# Altium PCB OSSI-1 Interface Board.PcbDoc
Units mil, origin at the board's own origin, x right, y up, seen from the top; angles counter-clockwise.
Board outline 3425.85 x 3229 mil, 2 copper layers (Top, Bottom), stack 61.811 mil thick; 24 components, 45 nets, 119 pads, 45 vias.
Unrouted connection lines stored in the file: 1.
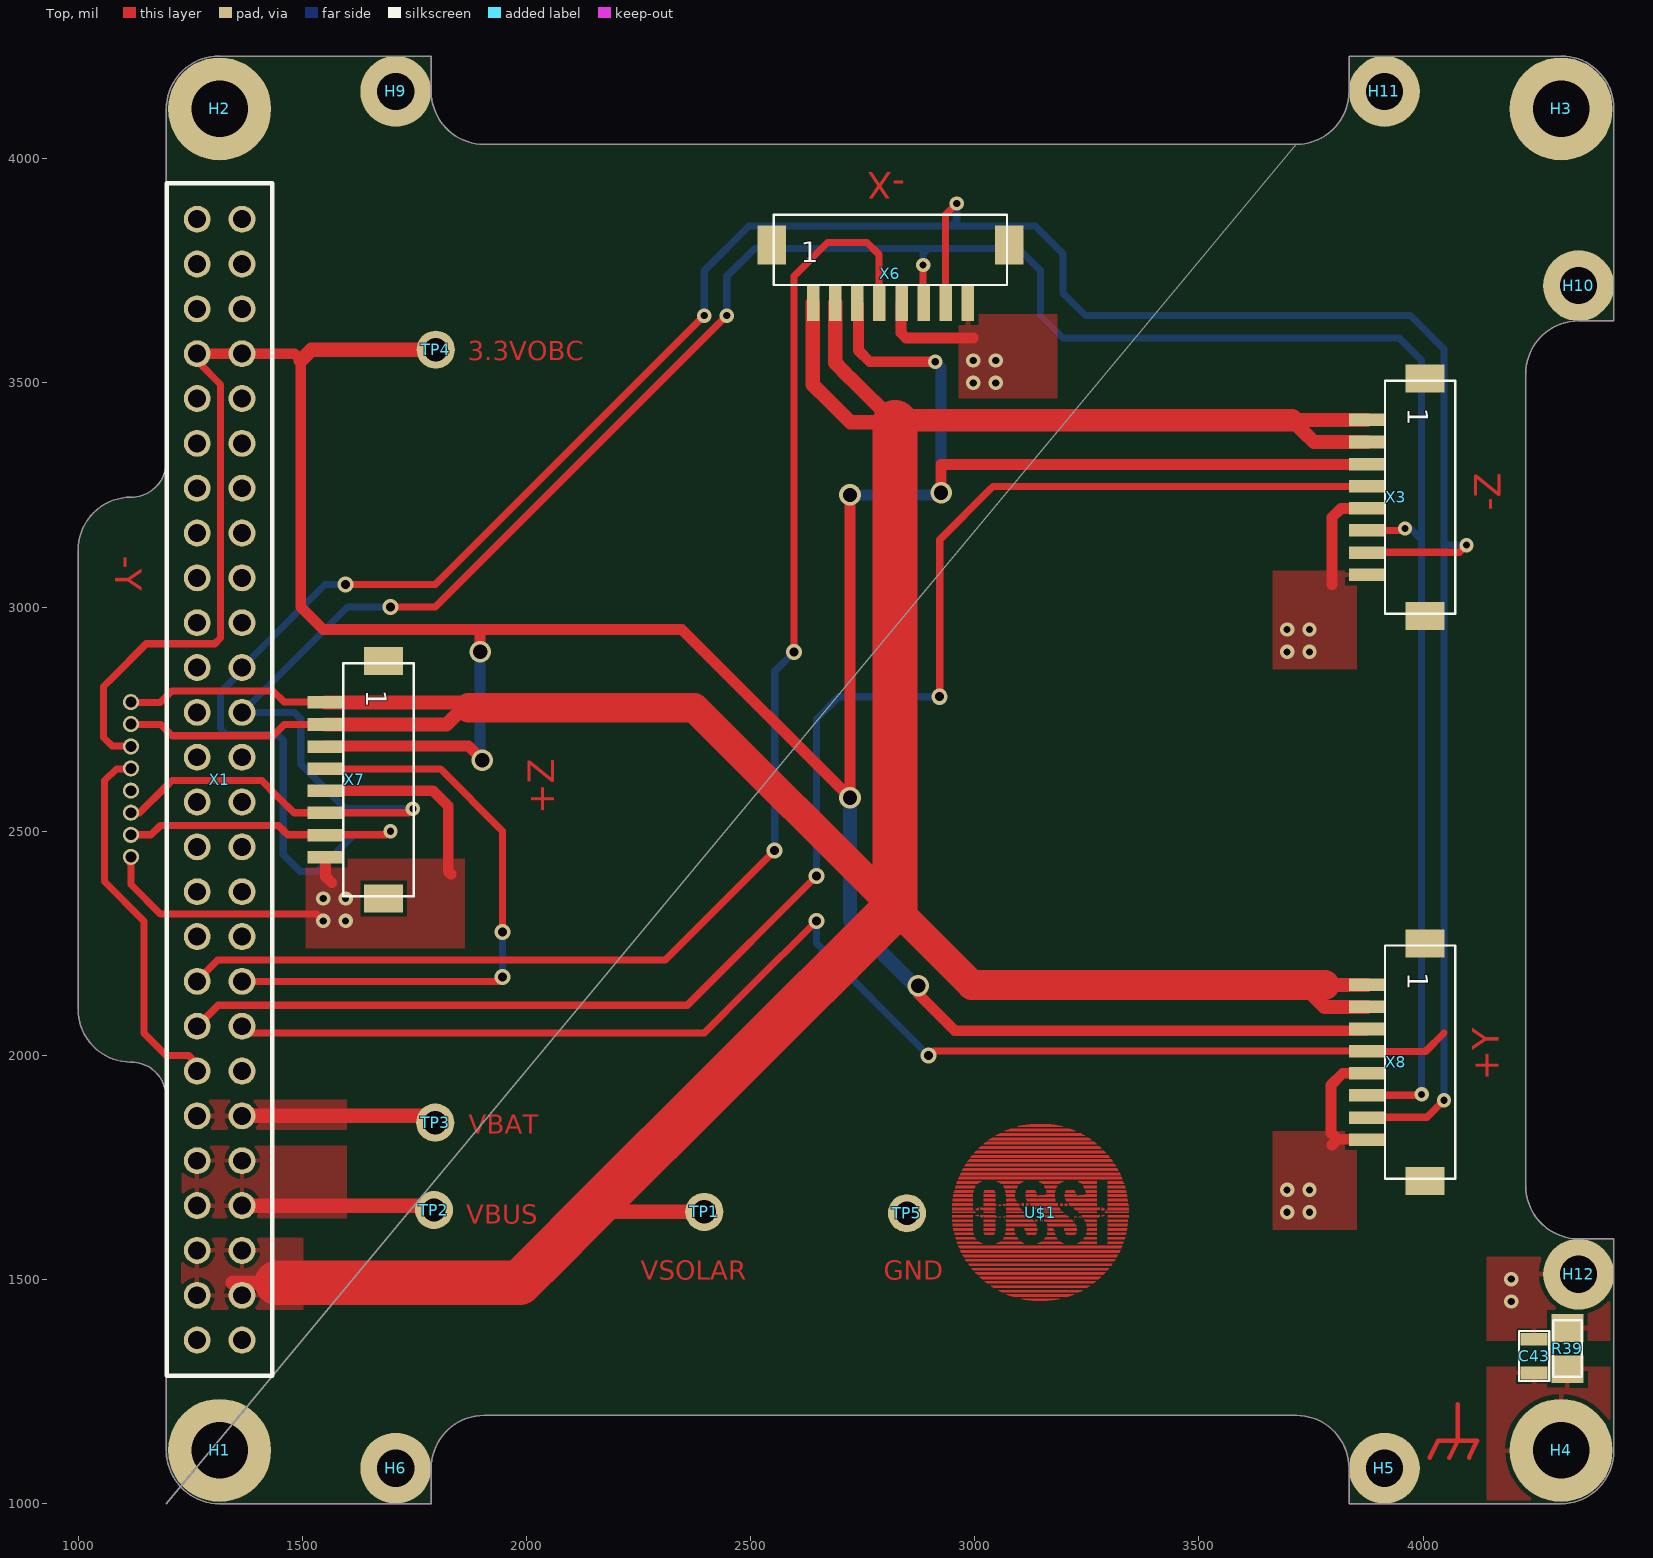
[diagram p0: Top view]
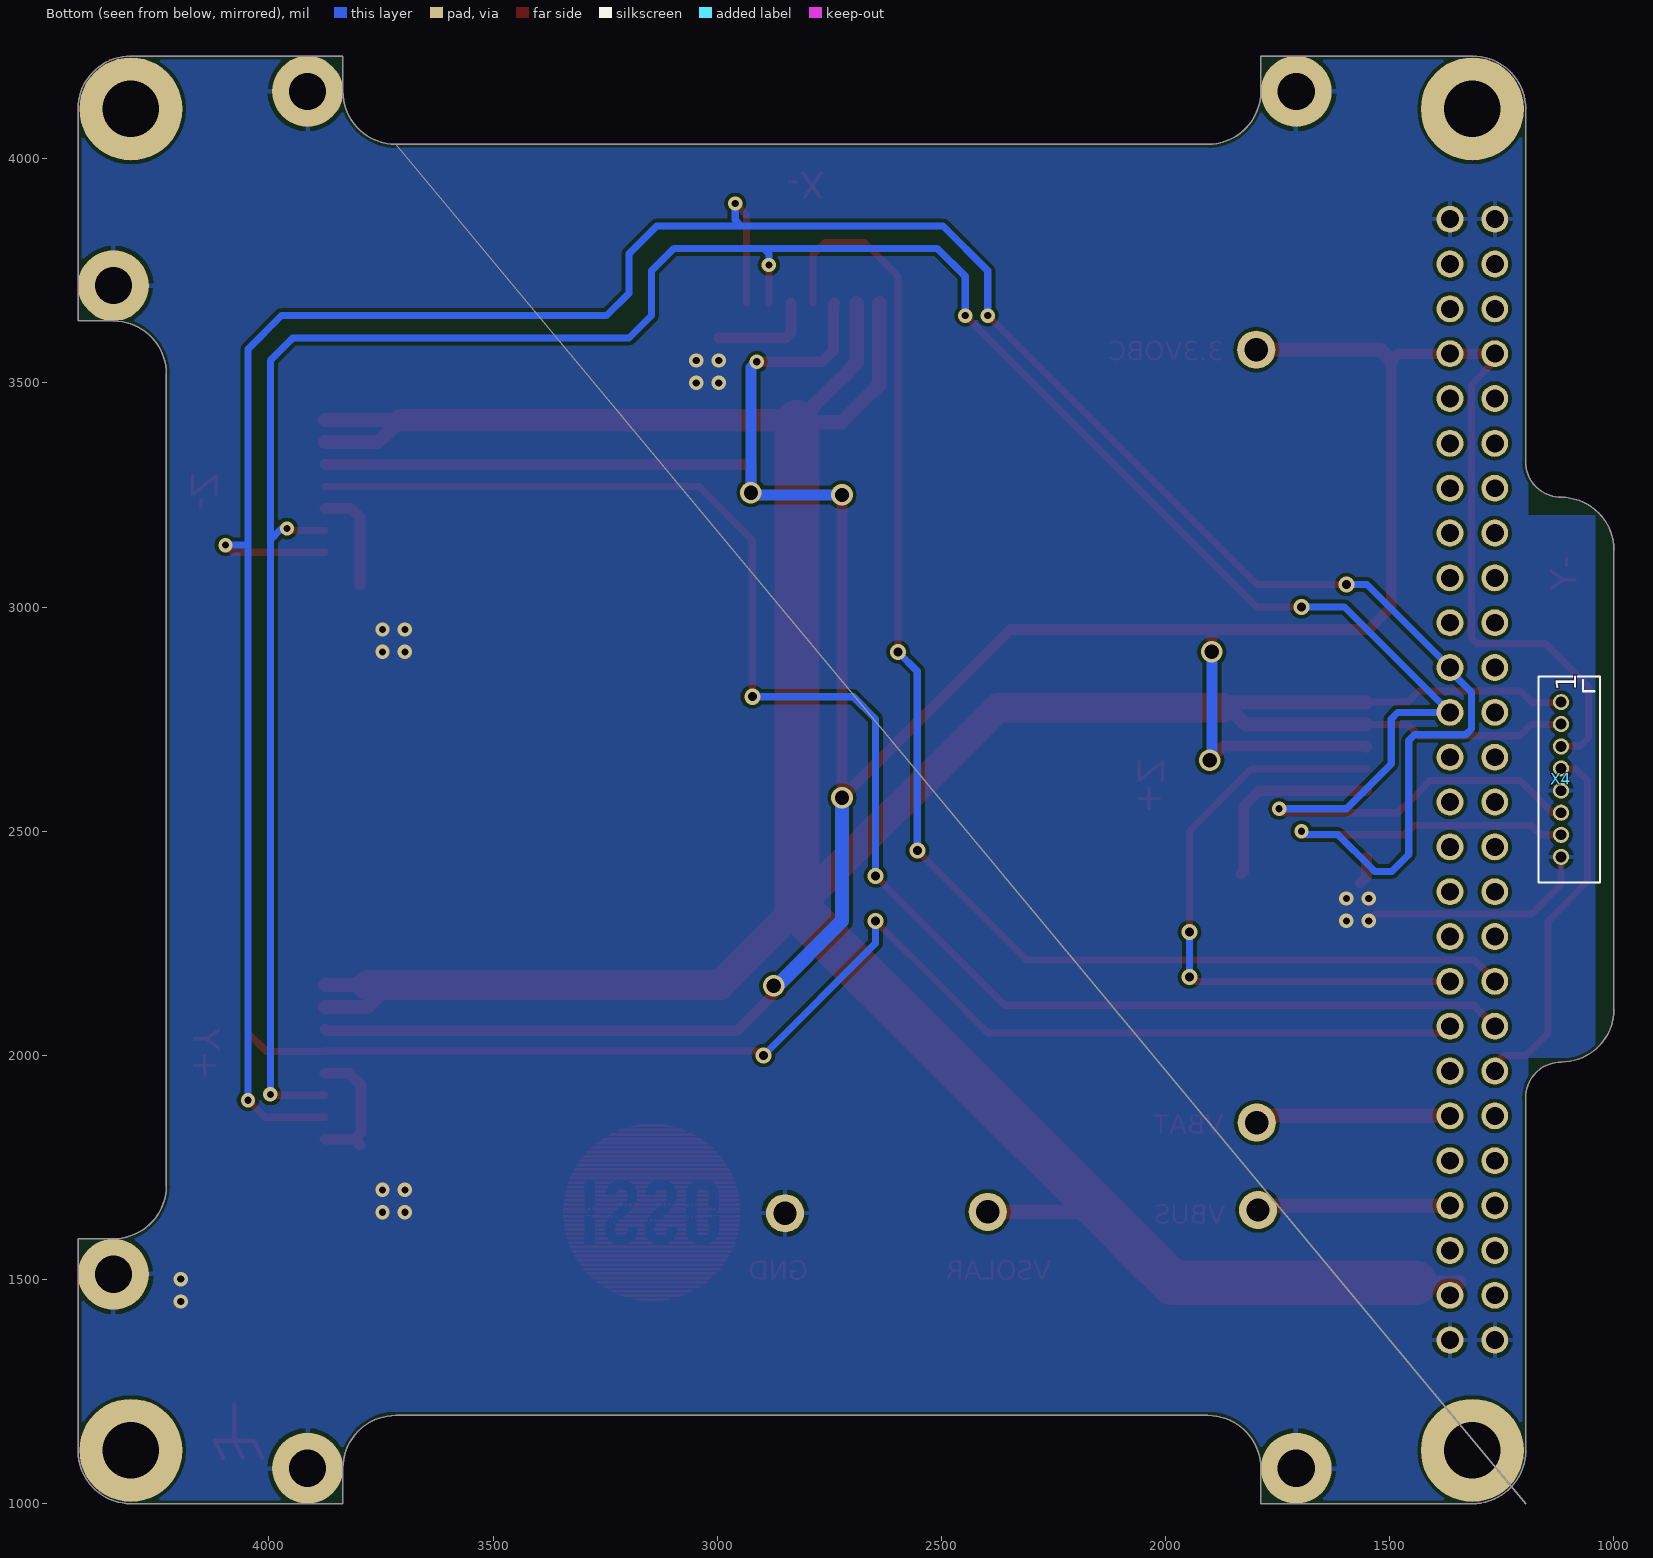
[diagram p1: Bottom view, seen from below]

## Layer stack, top to bottom
Top Solder: solder mask 0.4, Solder Resist, Dk 3.5
Top: signal copper 1.378
Dielectric 1: core 59.0551, FR-4, Dk 4.8
Bottom: signal copper 1.378
Bottom Solder: solder mask 0.4, Solder Resist, Dk 3.5

## Board outline
3716.85,4032 1905.85,4032 cw(c1905.85,4150) 1787.85,4150 1787.85,4229 1315.85,4229 ccw(c1315.35,4110.5) 1196.85,4111 1196.85,3323 cw(c1118.48,3323.37) 1118.11,3245 ccw(c1118.56,3126.44) 1000,3126 1000,2103 ccw(c1118.06,2103.06) 1118.11,1985 cw(c1117.98,1906.13) 1196.85,1906 1196.85,1591 1196.85,1119 ccw(c1315.85,1119) 1315.85,1000 1787.85,1000 1787.85,1079 cw(c1905.85,1079) 1905.85,1197 3716.85,1197 cw(c3716.85,1079) 3834.85,1079 3834.85,1000 4307.85,1000 ccw(c4307.35,1118.5) 4425.85,1119 4425.85,1591 4346.85,1591 cw(c4346.85,1709) 4228.85,1709 4228.85,3520 cw(c4346.85,3520) 4346.85,3638 4425.85,3638 4425.85,4111 ccw(c4307.85,4111) 4307.85,4229 3834.85,4229 3834.85,4150 cw(c3716.85,4150) 1196.85,1000

## Design rules (kind name [scope] priority, off if disabled: settings)
Clearance mdViaVia [IsVia vs IsVia] p1: gap=8
Clearance mdPadVia [IsPad vs IsVia] p2: gap=8
Clearance mdPadPad [IsPad vs IsPad] p3: gap=8
Clearance mdWireVia [(InLayerClass('Signal Layers') AND IsTrack) vs IsVia] p4: gap=8
Clearance mdWirePad [(InLayerClass('Signal Layers') AND IsTrack) vs IsPad] p5: gap=8
Clearance mdWireWire [(InLayerClass('Signal Layers') AND IsTrack) vs (InLayerClass('Signal Layers') AND IsTrack)] p6: gap=8
Clearance [All] p7: gap=8
HoleSize [All] p1: absolutevalues=TRUE maxlimit=100000 minlimit=24 maxpercent=80.000 minpercent=20.000
HoleToHoleClearance [All] p1: gap=8 allowstackedmicrovias=TRUE
PolygonConnect ThermalVias [IsVia] p1: connectstyle=Direct reliefconductorwidth=10 reliefentries=4 polygonreliefangle="90 Angle" airgapwidth=10
PolygonConnect [All] p2: connectstyle=Relief reliefconductorwidth=10 reliefentries=4 polygonreliefangle="90 Angle" airgapwidth=10
RoutingVias [All] p1: holewidth=28 width=50 viastyle="Through Hole" minholewidth=28 minwidth=50 maxholewidth=28 maxwidth=50
SilkToSilkClearance [All] p1 off: silktosilkclearance=10
SilkToSolderMaskClearance [IsPad] p1 off: minsilkscreentomaskgap=10 clearancetoexposedcopper=TRUE
SolderMaskExpansion [All] p1: expansion=4
Width [All] p1: maxlimit=100000 minlimit=10 preferedwidth=10
26 further rules are at their usual default settings.

## Components (designator, comment, footprint, x,y, rotation, side; value= is the part's Value field where it differs from the comment)
C43 "DNP" C0805(2012) 4247.85,1329 r90 top
H1 "" 3.2-PAD-ROUND 1315.85,1119 r0 top
H2 "" 3.2-PAD-ROUND 1315.85,4111 r0 top
H3 "" 3.2-PAD-ROUND 4307.85,4111 r0 top
H4 "" 3.2-PAD-ROUND 4307.85,1119 r0 top
H5 "" 2.1-PAD-ROUND 3913.85,1079 r0 top
H6 "" 2.1-PAD-ROUND 1708.85,1079 r0 top
H9 "" 2.1-PAD-ROUND 1708.85,4150 r0 top
H10 "" 2.1-PAD-ROUND 4346.85,3717 r0 top
H11 "" 2.1-PAD-ROUND 3913.85,4150 r0 top
H12 "" 2.1-PAD-ROUND 4346.85,1512 r0 top
R39 "DNP" WSL1206 4321.85,1346 r270 top
TP1 "TP" TP-13 2396.85,1651 r0 top
TP2 "TP" TP-13 1793.85,1655 r0 top
TP3 "TP" TP-13 1796.85,1850 r0 top
TP4 "TP" TP-13 1797.85,3574 r0 top
TP5 "TP" TP-13 2848.85,1648 r0 top
U$1 "" OSSILOGO1010 3146.85,1650 r0 top
X1 "ESQ-126-38-G-D" ESQ-126-XX-X-D 1315.85,2615 r180 top
X3 "DF13DF13A-8P-1.25H" DF13A-8P 3874.85,3245 r270 top
X4 "DF13DF13-8P-1.25DSA" DF13-8P-1.25DSA 1118.11,2615 r90 bottom
X6 "DF13DF13A-8P-1.25H" DF13A-8P 2811.85,3678 r0 top
X7 "DF13DF13A-8P-1.25H" DF13A-8P 1551.85,2615 r270 top
X8 "DF13DF13A-8P-1.25H" DF13A-8P 3874.85,1985 r270 top

## Footprints (in the part's own frame and the unit in brackets; to place one, negate y for a bottom-side part, rotate by r counter-clockwise, add the part's x,y. Pads: shape width x height; smd on the part's side, far side on the other; paste and mask are expansions set on the pad)
2.1-PAD-ROUND [mil] "2.1-PAD-ROUND"
  round 158 hole 83: B3,2(0,0)
3.2-PAD-ROUND [mil] "3.2-PAD-ROUND"
  round 230 hole 126: B3,2(0,0)
C0805(2012) [mil] "C0805(2012)"
  rect 28x60 smd: 1(-37.4,0) 2(38,0)
  silkscreen extent -55,-33 56,34
DF13-8P-1.25DSA [mil] "DF13-8P-1.25DSA"
  round 36 hole 24: 1(173,0) 2(124,0) 3(74,0) 4(25,0) 5(-24.61,0) 6(-73.82,0) 7(-123.03,0) 8(-172.24,0)
  silkscreen extent -229,-87 230,50
DF13A-8P [mil] "DF13A-8P"
  rect 28x79 smd: 1(-172.24,0) 2(-123.03,0) 3(-73.82,0) 4(-24.61,0) 5(25,0) 6(74,0) 7(124,0) 8(173,0)
  rect 63x87 smd: P$1(-264.76,130) P$2(265,130)
  silkscreen extent -260,40 260,197
ESQ-126-XX-X-D [mil] "ESQ-126-XX-X-D"
  round 60 hole 40: 1(-50,1250) 2(50,1250) 3(-50,1150) 4(50,1150) 5(-50,1050) 6(50,1050) 7(-50,950) 8(50,950) 9(-50,850) 10(50,850) 11(-50,750) 12(50,750) 13(-50,650) 14(50,650) 15(-50,550) 16(50,550) 17(-50,450) 18(50,450) 19(-50,350) 20(50,350) 21(-50,250) 22(50,250) 23(-50,150) 24(50,150) 25(-50,50) 26(50,50) 27(-50,-50) 28(50,-50) 29(-50,-150) 30(50,-150) 31(-50,-250) 32(50,-250) 33(-50,-350) 34(50,-350) 35(-50,-450) 36(50,-450) 37(-50,-550) 38(50,-550) 39(-50,-650) 40(50,-650) 41(-50,-750) 42(50,-750) 43(-50,-850) 44(50,-850) 45(-50,-950) 46(50,-950) 47(-50,-1050) 48(50,-1050) 49(-50,-1150) 50(50,-1150) 51(-50,-1250) 52(50,-1250)
  silkscreen extent -117,-1330 118,1330
OSSILOGO1010 [mil] "OSSILOGO1010"
  Top drawing of 1008 lines, arcs and shapes, not listed
TP-13 [mil] "TP-13"
  round 85 hole 52: TP(0,0)
WSL1206 [mil] "WSL1206"
  rect 62x71 smd: P$1(-45.87,0) P$2(46,0)
  silkscreen extent -63,-31 63,32

## Part data
C43: library part C0805(2012)
H1 H2 H3 H4: library part 3.2-PAD-ROUND
H5 H6 H9 H10 H11 H12: library part 2.1-PAD-ROUND
R39: library part WSL1206
TP1 TP2 TP3 TP4 TP5: library part TP-13
U$1: library part OSSILOGO1010
X1: library part ESQ-126-XX-X-D
X3 X6 X7 X8: library part DF13A-8P
X4: library part DF13-8P-1.25DSA

## Via types
v1: diameter 32/32 (per signal layer), hole 16, Top to Bottom, 29 vias
v2: diameter 36/36 (per signal layer), hole 20, Top to Bottom, 10 vias
v3: diameter 48/48 (per signal layer), hole 32, Top to Bottom, 6 vias

## Nets (pads, with @x,y where several pads share a name; then routed paths per layer and width w, separated by ;. In a path a pad name is that pad's centre, name@x,y a point inside that pad or via, vN(x,y) a via of type N, cw(c..) or ccw(c..) an arc to the next point about the centre after c; other vN are vias at no path point)
3.3VOBC: TP4.TP X1.45 X1.46 X3.3 X4.3 X6.3 X7.3 X8.3 | length 8329.6
  Top w16: X4.3@1118.11,2688 1117,2690 1076.2,2690 1057.15,2709 1057.15,2823 1076.2,2842 1152.4,2918 1304.85,2918 1317.85,2931 1317.85,3496 1265.85,3549 X1.46
  Top w24: X1.46 X1.45 1482.85,3565 1496.85,3550 1496.85,3000 1546.85,2950 1896.85,2950 ; X7.3@1551.85,2688 1552.85,2690 1870.85,2690 v3(1901.85,2658) ; v3(1896.85,2900) 1896.85,2950 ; v3(2721.85,3250) 2721.85,2700 v3(2721.85,2575) 2346.85,2950 1896.85,2950 ; X6.3@2737.85,3678 2740.85,3675 2740.85,3572 2765.85,3547 v1(2911.85,3547) ; v3(2873.85,2155) 2873.85,2137 2955.85,2055 3870.85,2055 X8.3@3874.85,2059 ; v3(2924.85,3255) 2924.85,3318 3686.85,3318 X3.3@3874.85,3318
  Top w32: 1496.85,3550 1520.85,3574 TP4.TP
  Bottom w24: v3(1896.85,2900) 1896.85,2663 v3(1901.85,2658) ; v3(2721.85,3250) 2919.85,3250 v3(2924.85,3255) 2924.85,3534 v1(2911.85,3547)
  Bottom w32: v3(2721.85,2575) 2721.85,2300 2871.85,2150 2873.85,2152 v3(2873.85,2155)
ANT_DEPLOY1: X1.19
ANT_DEPLOY2: X1.20
BAT_-CHRG: X1.42
BAT_-FAULT: X1.44
BAT_-ON: X1.38
BAT_TEMP: X1.47
BEACON_-FAULT: X1.30
BEACON_OFF: X1.24
BEACON_SCL: X1.37
BEACON_SDA: X1.39
BUS_CS: X1.27
COMMS_-FAULT: X1.32
COMMS_OFF: X1.25
COMMS_SCL: X1.41
COMMS_SDA: X1.43
GND: C43.2 H5.B3,2 H6.B3,2 H9.B3,2 H10.B3,2 H11.B3,2 H12.B3,2 R39.P$1 TP5.TP X1.1 X1.2 X1.51 X1.52 X3.5 X3.8 X4.5 X4.8 X6.5 X6.8 X7.5 X7.8 X8.5 X8.8 | length 1799.2
  Top w16: X4.8@1118.11,2442 1118.11,2381 1184.15,2315 1532.85,2315 v1(1546.85,2300)
  Top w24: X7.8 1551.85,2399 1565.85,2385 ; X7.5 1791.85,2590 1825.85,2556 1825.85,2410 1831.85,2404 ; X6.5@2835.85,3678 2835.85,3612 2846.85,3600 2996.85,3600 ; 3796.85,1800 3809.85,1813 ; 3796.85,3050 3796.85,3200 3816.85,3220 X3.5 ; X8.8@3874.85,1813 3809.85,1813 ; X8.5 3820.85,1960 3794.85,1934 3794.85,1827 3809.85,1813
  other v1: 4196.85,1451 4196.85,1501 3696.85,1650 3746.85,1650 3696.85,1700 3746.85,1700 1596.85,2300 1546.85,2350 1596.85,2350 3696.85,2900 3746.85,2900 3696.85,2950 3746.85,2950 2996.85,3500 3046.85,3500 2996.85,3550 3046.85,3550
LED_-FAULT: X1.28
LED_OFF: X1.23
LED_SCL: X1.33
LED_SDA: X1.35
N$2: 
N$58:  | length 75
  Top w10: 4077.85,1147 4077.85,1222
N$59:  | length 214
  Top w10: 4014.85,1103 4033.85,1141 4077.85,1141 ; 4058.85,1103 4077.85,1141 ; 4102.85,1103 4120.85,1141 4077.85,1141
OBC_-FAULT: X1.34
OBC_OFF: X1.26
PANELTEMP_SCL: X1.29 X3.6 X4.6 X6.6 X7.6 X8.6 | length 6518.5
  Top w16: X4.6@1118.11,2541 1137.2,2541 1196.85,2600 1209.85,2613 1409.85,2613 1446.85,2575 1481.85,2541 X7.6 1737.85,2541 v1(1746.85,2550) ; v2(1696.85,3000) 1796.85,3000 1846.85,3050 v1(2446.85,3650) ; X6.6@2884.85,3678 v1(2884.85,3763) ; X8.6 3994.85,1911 v1(3996.85,1913) ; X3.6 3954.85,3171 v1(3959.85,3175)
  Bottom w16: X1.29@1361.85,2765 X1.29 ; v2(1696.85,3000) 1600.85,3000 X1.29 ; v1(1746.85,2550) 1696.85,2550 1596.85,2550 1496.85,2650 1496.85,2750 1482.85,2765 X1.29 ; v1(2446.85,3650) 2446.85,3738 2509.85,3800 2896.85,3800 ; v1(2884.85,3763) 2884.85,3788 2896.85,3800 ; v1(3959.85,3175) 3971.85,3175 3996.85,3150 ; v1(3996.85,1913) 3996.85,3150 ; 2896.85,3800 3096.85,3800 3146.85,3750 3146.85,3650 3196.85,3600 3946.85,3600 3996.85,3550 3996.85,3150
PANELTEMP_SDA: X1.31 X3.7 X4.7 X6.7 X7.7 X8.7 | length 7194.1
  Top w16: X4.7 1162.99,2492 1184.35,2513 1446.85,2513 1459.85,2500 1468.85,2492 1551.85,2492 1686.85,2492 v1(1696.85,2500) ; v2(1596.85,3050) 1646.85,3050 1796.85,3050 v1(2396.85,3650) ; X6.7@2934.85,3678 2934.85,3875 v1(2959.85,3900) ; X8.7@3874.85,1862 4008.85,1862 v1(4046.85,1900) ; X3.7@3874.85,3122 4080.85,3122 v1(4096.85,3138)
  Bottom w16: v2(1596.85,3050) 1550.85,3050 X1.31 1365.85,2858 1317.85,2810 1317.85,2728 1330.85,2715 1444.85,2715 1457.85,2702 1457.85,2448 1495.85,2410 1533.85,2410 1539.85,2417 1616.85,2493 1685.85,2493 1690.85,2494 v1(1696.85,2500) ; v1(2396.85,3650) 2396.85,3750 2496.85,3850 2946.85,3850 ; v1(2959.85,3900) 2959.85,3863 2946.85,3850 ; v1(4046.85,1900) 4046.85,3138 ; v1(4096.85,3138) 4046.85,3138 ; 2946.85,3850 3134.85,3850 3196.85,3788 3196.85,3700 3246.85,3650 3971.85,3650 4046.85,3575 4046.85,3138
SC_-ON: X1.40
SC_-PFO: X1.48
SCCHG_EN: X1.21
SCOUT_-PG: X1.50
SCOUT_EN: X1.22
SOLAR_-ON: X1.36
SOLAR_CS1: X1.15 X8.4 | length 2970.7
  Top w16: X1.15 1379.85,2050 2396.85,2050 2496.85,2150 v2(2646.85,2300) ; v2(2896.85,2000) 2906.85,2010 3876.85,2010 3874.85,2010 3874.85,2009 4005.85,2009 4046.85,2050
  Bottom w16: v2(2646.85,2300) 2646.85,2250 v2(2896.85,2000)
SOLAR_CS2: X1.14 X4.4 | length 832.4
  Top w16: X4.4@1118.11,2639 1085.63,2639 1059.35,2613 1059.35,2388 1146.85,2300 1146.85,2050 1196.85,2000 1246.85,2000 1265.85,1982 X1.14
SOLAR_CS3: X1.17 X7.4 | length 1363
  Top w16: X1.17 1936.85,2165 v2(1946.85,2175) ; X7.4@1551.85,2639 1808.85,2639 1946.85,2500 v2(1946.85,2275)
  Bottom w16: v2(1946.85,2175) v2(1946.85,2275)
SOLAR_CS4: X1.16 X3.4 | length 3517.8
  Top w16: X1.16 1312.85,2112 1349.85,2112 2276.85,2112 2358.85,2112 v2(2646.85,2400) ; v2(2921.85,2800) 2921.85,3150 3034.85,3263 3040.85,3269 X3.4@3874.85,3269
  Bottom w16: v2(2646.85,2400) 2646.85,2750 2696.85,2800 v2(2921.85,2800)
SOLAR_CS5: X1.18 X6.4 | length 3049.2
  Top w16: X1.18 1265.85,2167 1311.85,2213 2309.85,2213 v2(2553.85,2457) ; v2(2596.85,2900) 2596.85,3650 2596.85,3738 2671.85,3813 2759.85,3813 2784.85,3788 2786.85,3786 2786.85,3761 X6.4@2786.85,3678
  Bottom w16: v2(2553.85,2457) 2553.85,2857 v2(2596.85,2900)
STRUT_GND: C43.1 H4.B3,2 R39.P$2
SUPERCAP_TEMP: X1.49
VBAT: TP3.TP X1.11 X1.12 | length 437.5
  Top w32: X1.11 1782.85,1865 TP3.TP
VBUS: TP2.TP X1.7 X1.8 X1.9 X1.10 | length 443.8
  Top w32: X1.7 1782.85,1665 1796.85,1650 1796.85,1652 TP2.TP
VSOLAR: TP1.TP X1.3 X1.4 X1.5 X1.6 X3.1 X3.2 X4.1 X4.2 X6.1 X6.2 X7.1 X7.2 X8.1 X8.2 | length 9141.6
  Top w12: 3756.85,2132 3756.85,2157
  Top w16: X4.2@1118.11,2738 1184.65,2738 1209.85,2713 1434.85,2713 1459.85,2738 X7.2 ; X4.1@1118.11,2787 1183.27,2787 1209.85,2813 1434.85,2813 1459.85,2788 1546.85,2788 1550.85,2788 X7.1@1551.85,2787
  Top w32: 1344.85,1493 1443.85,1493 ; X7.2 1821.85,2738 1865.85,2782 ; X7.1@1551.85,2787 1860.85,2787 1865.85,2782 ; 1871.85,2775 1865.85,2782 ; 2119.85,1628 2143.85,1651 TP1.TP ; X6.1@2638.85,3678 2638.85,3496 2673.85,3461 2722.85,3412 2821.85,3412 ; X6.2@2688.85,3678 2688.85,3545 2722.85,3510 2821.85,3412 ; 2825.85,3417 2821.85,3412 ; 3756.85,2132 3780.85,2108 X8.2 ; 3780.85,2157 X8.1@3874.85,2157 ; X3.2 3756.85,3368 3706.85,3417 X3.1@3874.85,3417
  Top w50: 2821.85,3412 2825.85,3417 3706.85,3417
  Top w66: 1871.85,2775 2374.85,2775 2821.85,2329 2993.85,2157 3756.85,2157 3780.85,2157
  Top w100: 1443.85,1493 1984.85,1493 2056.85,1565 2119.85,1628 2821.85,2329 2821.85,3412
VSUPERCAP: X1.13
pads on no net: H1.B3,2 H2.B3,2 H3.B3,2 X3.P$1 X3.P$2 X6.P$1 X6.P$2 X7.P$1 X7.P$2 X8.P$1 X8.P$2

## Polygon pours and split planes (outlines as drawn)
VSOLAR on Top "Top-VSOLAR" (solid, remove dead copper, pour order 2): 1229.85,1593 1229.85,1433 1501.85,1433 1501.85,1593
GND on Top "Top-GND" (solid, remove dead copper, pour order 8): 2963.85,3653 2963.85,3466 3183.85,3466 3183.85,3477 3183.85,3653
GND on Top "Top-GND 1" (solid, remove dead copper, pour order 10): 3664.85,2861 3851.85,2861 3851.85,3081 3840.85,3081 3664.85,3081
GND on Top "Top-GND 2" (solid, remove dead copper, pour order 12): 3664.85,1611 3851.85,1611 3851.85,1831 3840.85,1831 3664.85,1831
GND on Top "Top-GND 3" (solid, remove dead copper, pour order 14): 4429.85,1363 4429.85,1551 4141.85,1551 4141.85,1363
GND on Top "Top-GND 4" (solid, remove dead copper, pour order 16): 1507.85,2239 1862.85,2239 1862.85,2439 1507.85,2439
VBUS on Top "Top-VBUS" (solid, remove dead copper, pour order 22): 1230.85,1799 1230.85,1637 1598.85,1637 1598.85,1799
VBAT on Top "Top-VBAT" (solid, remove dead copper, pour order 24): 1242.85,1901 1242.85,1834 1598.85,1834 1598.85,1901
STRUT_GND on Top "Top-STRUT_GND" (solid, remove dead copper, pour order 26): 4432.85,1305 4432.85,995 4141.85,995 4141.85,1305
GND on Bottom "Bottom-GND" (solid, remove dead copper, pour order 4): 1190.85,4235 4431.85,4235 4431.85,994 1190.85,994
GND on Bottom "Bottom-GND 1" (solid, remove dead copper, pour order 6): 1041.85,3205 1041.85,1995 1201.85,1995 1201.85,3205
GND on Bottom "Bottom-GND 2" (solid, remove dead copper, pour order 18): 1175.8,2307 1552.85,2307 1552.85,2323 1175.8,2323
GND on Bottom "Bottom-GND 3" (solid, remove dead copper, pour order 20): 1158.35,2408 1436.85,2408 1436.85,2307 1598.85,2307 1598.85,2352 1478.88,2352 1479.88,2427 1158.35,2427

## Keep-outs
Keep-Out Layer:
  lines w0: 1000,2103 ccw(c1118.06,2103.06) 1118.11,1985 cw(c1117.98,1906.13) 1196.85,1906 1196.85,1591 1196.85,1119 ccw(c1315.85,1119) 1315.85,1000 1787.85,1000 1787.85,1079 cw(c1905.85,1079) 1905.85,1197 3716.85,1197 cw(c3716.85,1079) 3834.85,1079 3834.85,1000 4307.85,1000 ccw(c4307.35,1118.5) 4425.85,1119 4425.85,1591 4346.85,1591 cw(c4346.85,1709) 4228.85,1709 4228.85,3520 cw(c4346.85,3520) 4346.85,3638 4425.85,3638 4425.85,4111 ccw(c4307.85,4111) 4307.85,4229 3834.85,4229 3834.85,4150 cw(c3716.85,4150) 3716.85,4032 1905.85,4032 cw(c1905.85,4150) 1787.85,4150 1787.85,4229 1315.85,4229 ccw(c1315.35,4110.5) 1196.85,4111 1196.85,3323 cw(c1118.48,3323.37) 1118.11,3245 ccw(c1118.56,3126.44) 1000,3126 1000,2103

## Other copper
Top:
  text "-X" at 2844.85,3970 h59.5 r180
  text "3.3VOBC" at 1868.85,3550 h42.5
  text "-Z" at 4172.85,3215 h59.5 r90
  text "-Y" at 1082.68,3114 h59.5 r270
  text "+Z" at 2061.85,2538 h59.5 r90
  text "+Y" at 4168.85,1943 h59.5 r90
  text "VBAT" at 1871.85,1825 h42.5
  text "VBUS" at 1865.85,1624 h42.5
  text "VSOLAR" at 2254.85,1500 h42.5
  text "GND" at 2796.85,1500 h42.5
Bottom:
  pour cut-out net N$2: 1196.85,1000 1206.85,1000 1206.85,1010 1196.85,1010
  pour cut-out net N$2: 1196.85,1000 1206.85,1000 1206.85,1010 1196.85,1010
  pour cut-out net N$2: 1196.85,1000 1206.85,1000 1206.85,1010 1196.85,1010
  pour cut-out net N$2: 1196.85,1000 1206.85,1000 1206.85,1010 1196.85,1010

## Silkscreen, mask and mechanical layers (free items; w line width, h text height)
Dimension:
  lines w0: 1000,2103 ccw(c1118.06,2103.06) 1118.11,1985 cw(c1117.98,1906.13) 1196.85,1906 1196.85,1591 1196.85,1119 ccw(c1315.85,1119) 1315.85,1000 1787.85,1000 1787.85,1079 cw(c1905.85,1079) 1905.85,1197 3716.85,1197 cw(c3716.85,1079) 3834.85,1079 3834.85,1000 4307.85,1000 ccw(c4307.35,1118.5) 4425.85,1119 4425.85,1591 4346.85,1591 cw(c4346.85,1709) 4228.85,1709 4228.85,3520 cw(c4346.85,3520) 4346.85,3638 4425.85,3638 4425.85,4111 ccw(c4307.85,4111) 4307.85,4229 3834.85,4229 3834.85,4150 cw(c3716.85,4150) 3716.85,4032 1905.85,4032 cw(c1905.85,4150) 1787.85,4150 1787.85,4229 1315.85,4229 ccw(c1315.35,4110.5) 1196.85,4111 1196.85,3323 cw(c1118.48,3323.37) 1118.11,3245 ccw(c1118.56,3126.44) 1000,3126 1000,2103

## Text inside footprints (layer, text, board x,y; h text height)
C43: tNames ">NAME" at 4207.85,1294 h77.5 r90; tValues ">VALUE" at 4337.85,1294 h77.5 r90
R39: tNames ">NAME" at 4371.85,1471 h77.5 r270; tValues ">VALUE" at 4221.85,1496 h77.5 r270
TP1: tNames ">NAME" at 2356.85,1701 h77.5; tValues ">VALUE" at 2396.85,1651 h1.55; tTest ">TP_SIGNAL_NAME" at 2346.85,1551 h62
TP2: tNames ">NAME" at 1753.85,1705 h77.5; tValues ">VALUE" at 1793.85,1655 h1.55; tTest ">TP_SIGNAL_NAME" at 1743.85,1555 h62
TP3: tNames ">NAME" at 1756.85,1900 h77.5; tValues ">VALUE" at 1796.85,1850 h1.55; tTest ">TP_SIGNAL_NAME" at 1746.85,1750 h62
TP4: tNames ">NAME" at 1757.85,3624 h77.5; tValues ">VALUE" at 1797.85,3574 h1.55; tTest ">TP_SIGNAL_NAME" at 1747.85,3474 h62
TP5: tNames ">NAME" at 2808.85,1698 h77.5; tValues ">VALUE" at 2848.85,1648 h1.55; tTest ">TP_SIGNAL_NAME" at 2798.85,1548 h62
X1: tNames ">NAME" at 1490.85,1165 h108.5 r180; tValues ">VALUE" at 1490.85,1240 h108.5 r180
X3: Top Overlay "1" at 3949.85,3445 h77.5 r270; tNames ">NAME" at 4150.85,3481.22 h77.5 r270; tValues ">VALUE" at 4096.85,3481.22 h77.5 r270
X4: Bottom Overlay "1" at 1068.9,2812 h77.5 r270; bNames ">NAME" at 968.11,2390 h77.5 r270; bValues ">VALUE" at 893.11,2390 h77.5 r270
X6: Top Overlay "1" at 2611.85,3753 h77.5; tNames ">NAME" at 2575.63,3954 h77.5; tValues ">VALUE" at 2575.63,3900 h77.5
X7: Top Overlay "1" at 1626.85,2815 h77.5 r270; tNames ">NAME" at 1827.85,2851.22 h77.5 r270; tValues ">VALUE" at 1773.85,2851.22 h77.5 r270
X8: Top Overlay "1" at 3949.85,2185 h77.5 r270; tNames ">NAME" at 4150.85,2221.22 h77.5 r270; tValues ">VALUE" at 4096.85,2221.22 h77.5 r270